# Altium PCB pay-optical.PcbDoc (part 4 of 5)
Units mm, origin at the board's own origin, x right, y up, seen from the top; angles counter-clockwise.
Board outline 128 x 54 mm, 4 copper layers (Top Layer, GND, VCC, Bottom Layer), stack 0.778 mm thick; 461 components, 247 nets, 1368 pads, 498 vias.
Unrouted connection lines stored in the file: 117.
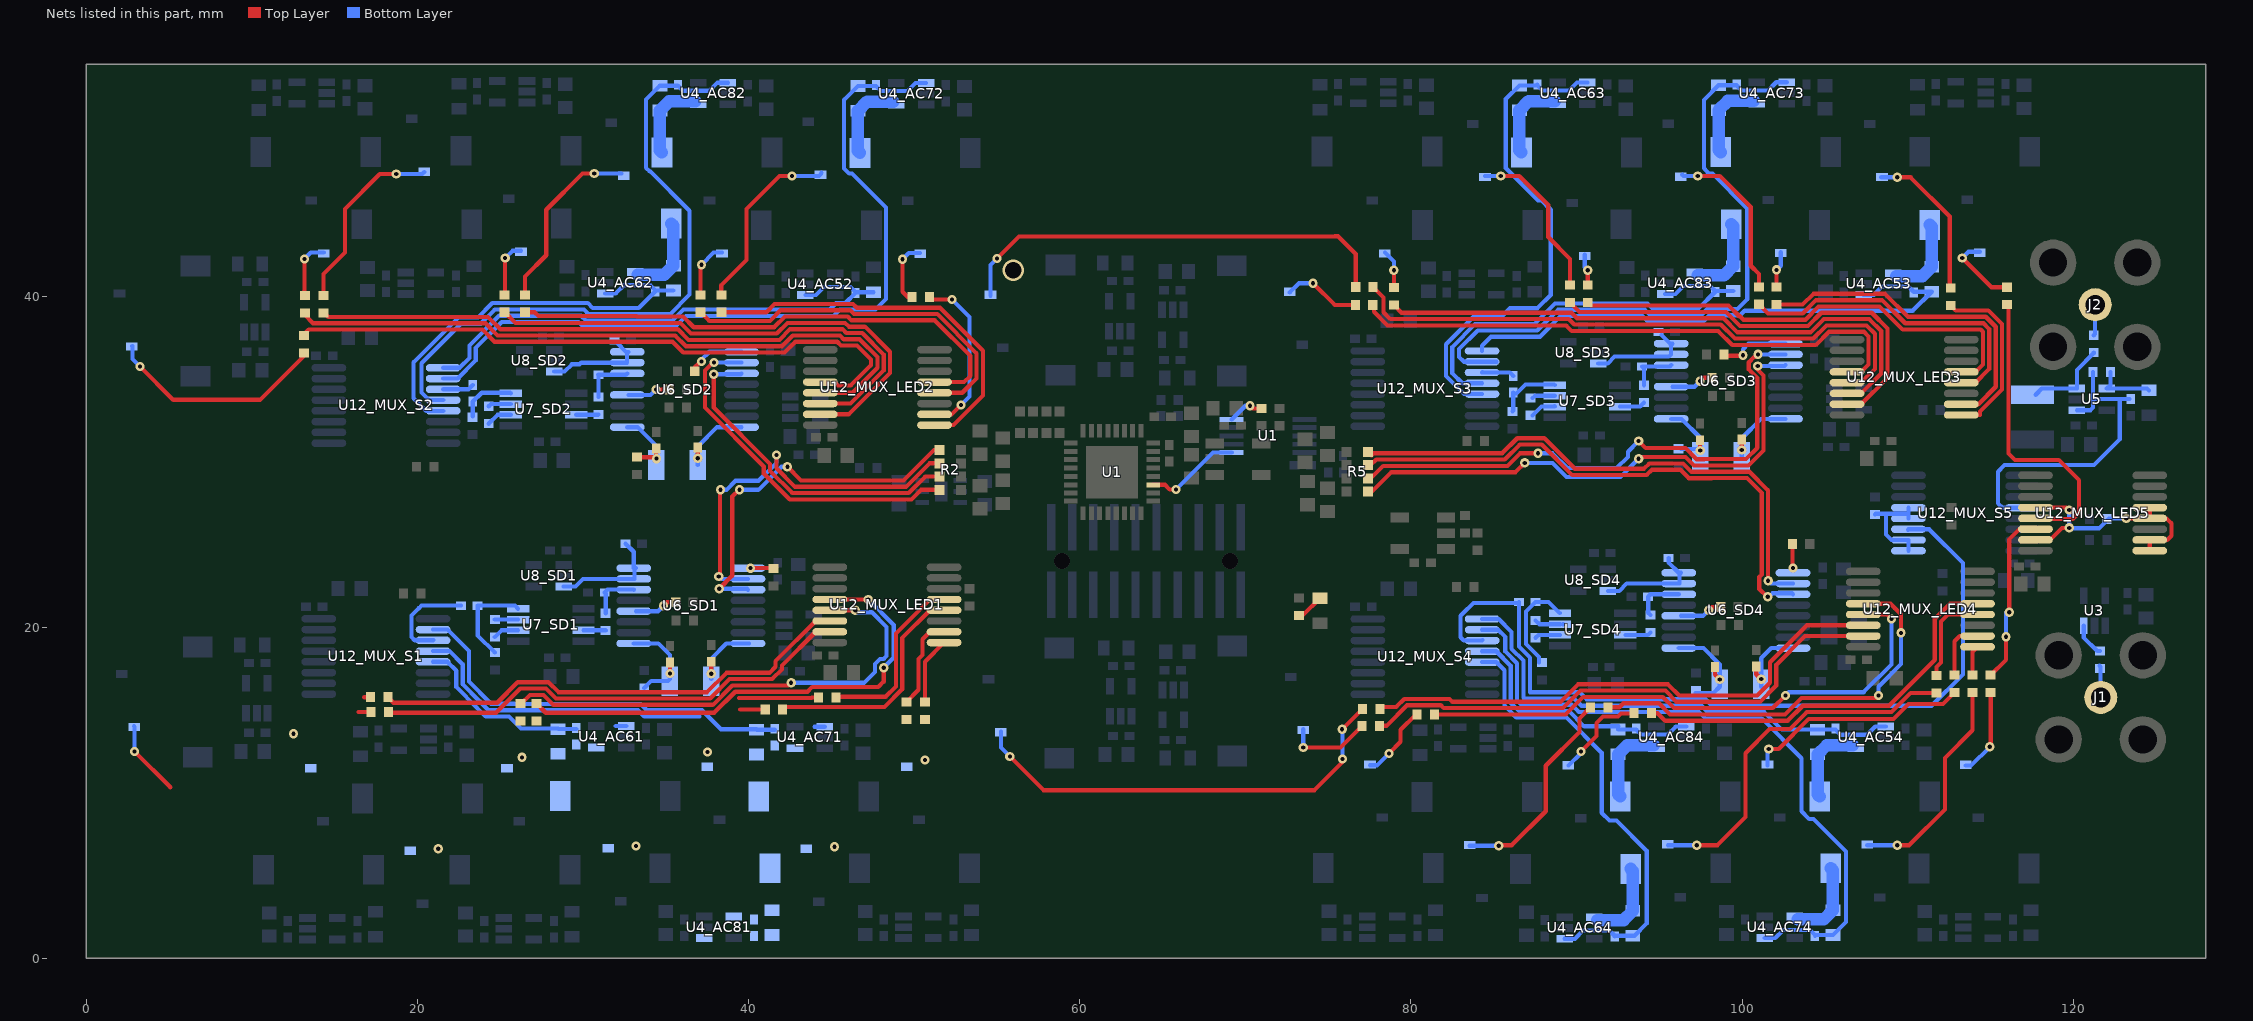
[diagram p6: the nets of this part, all layers, seen from the top]

## Via types
v1: diameter 0.559, hole 0.254, Top Layer to Bottom Layer, 442 vias
v2: diameter 2.362, hole 2.1, Top Layer to Bottom Layer, 34 vias
v3: diameter 1.3, hole 1, Top Layer to Bottom Layer, 14 vias
v4: diameter 6, hole 3.6, Top Layer to Bottom Layer, 8 vias

## Nets (pads, with @x,y where several pads share a name; then routed paths per layer and width w, separated by ;. In a path a pad name is that pad's centre, name@x,y a point inside that pad or via, vN(x,y) a via of type N, cw(c..) or ccw(c..) an arc to the next point about the centre after c; other vN are vias at no path point) (continued)
NetC17_AC52_2: C17_AC52.2 R10_AC52.2 U4_AC52.1 U12_MUX_S2.1 | length 32
  Bottom Layer w0.254: U12_MUX_S2.1@21.555,35.666 22.547,35.666 23.139,36.259 23.139,37.013 24.937,38.811 29.896,38.811 30.192,38.515 35.401,38.515 36.067,39.181 44.899,39.181 45.284,39.566 45.839,39.566 46.461,40.187 C17_AC52.2@46.461,40.234 ; U4_AC52.1@43.434,40.055 44.065,40.055 44.554,40.544 46.151,40.544 C17_AC52.2@46.461,40.234 ; R10_AC52.2@47.547,40.234 C17_AC52.2@46.461,40.234
NetC17_AC53_1: C17_AC53.1 D2_AC53.2 R10_AC53.1 U4_AC53.4 | length 5
  Bottom Layer w0.75: U4_AC53.4@109.311,41.205 C17_AC53.1@110.358,41.205 110.893,41.205 R10_AC53.1@111.448,41.76 111.448,44.173 D2_AC53.2@111.323,44.298
NetC17_AC53_2: C17_AC53.2 R10_AC53.2 U4_AC53.1 U12_MUX_S3.1 | length 33.5
  Bottom Layer w0.254: U12_MUX_S3.1@84.293,36.682 84.293,36.996 84.839,37.541 87.788,37.541 89.032,38.786 93.976,38.786 94.275,38.487 97.685,38.487 98.034,38.837 99.878,38.837 100.158,39.116 110.305,39.116 R10_AC53.2@111.448,40.26 110.362,40.26 110.053,40.569 108.456,40.569 107.967,40.08 U4_AC53.1@107.336,40.08
NetC17_AC54_1: C17_AC54.1 D2_AC54.2 R10_AC54.1 U4_AC54.4 | length 5
  Bottom Layer w0.75: D2_AC54.2@104.679,9.78 104.555,9.904 R10_AC54.1@104.555,12.318 105.109,12.872 C17_AC54.1@105.644,12.872 U4_AC54.4@106.692,12.872
NetC17_AC54_2: C17_AC54.2 R10_AC54.2 U4_AC54.1 U12_MUX_S4.1 | length 29.4
  Bottom Layer w0.254: U12_MUX_S4.1@84.3,20.497 85.299,20.497 86.081,19.715 86.081,18.696 86.792,17.984 86.792,15.739 86.833,15.697 89.856,15.697 90.295,15.258 97.544,15.258 97.943,14.859 101.346,14.859 102.388,13.817 R10_AC54.2@104.555,13.818 105.64,13.818 105.95,13.508 107.547,13.508 108.036,13.997 U4_AC54.1@108.667,13.997
NetC17_AC61_1: C17_AC61.1 D2_AC61.2 R10_AC61.1 U4_AC61.4
NetC17_AC61_2: C17_AC61.2 R10_AC61.2 U4_AC61.1 U12_MUX_S1.5 | length 11.5
  Bottom Layer w0.254: U12_MUX_S1.5@20.946,17.911 21.813,17.911 22.352,17.372 22.352,16.383 23.604,15.131 24.124,14.611 25.527,14.611 26.261,13.876 R10_AC61.2@28.502,13.876 ; R10_AC61.2@28.502,13.851 C17_AC61.2@29.588,13.851 ; 31.983,14.03 U4_AC61.1@32.614,14.03
NetC17_AC62_1: C17_AC62.1 D2_AC62.2 R10_AC62.1 U4_AC62.4 | length 5
  Bottom Layer w0.75: U4_AC62.4@33.319,41.281 C17_AC62.1@34.366,41.281 34.901,41.281 R10_AC62.1@35.456,41.836 35.456,44.249 D2_AC62.2@35.331,44.374
NetC17_AC62_2: C17_AC62.2 R10_AC62.2 U4_AC62.1 U12_MUX_S2.5 | length 25.4
  Bottom Layer w0.254: U12_MUX_S2.5@21.555,33.066 20.534,33.066 19.772,33.827 19.772,35.997 22.485,38.71 23.655,38.71 24.518,39.573 30.294,39.573 30.585,39.282 33.364,39.282 34.37,40.289 C17_AC62.2@34.37,40.336 ; U4_AC62.1@31.344,40.156 31.975,40.156 32.464,40.645 34.061,40.645 C17_AC62.2@34.37,40.336 ; R10_AC62.2@35.456,40.336 C17_AC62.2@34.37,40.336
NetC17_AC63_1: C17_AC63.1 D2_AC63.2 R10_AC63.1 U4_AC63.4 | length 5
  Bottom Layer w0.75: D2_AC63.2@86.672,48.675 86.547,48.8 R10_AC63.1@86.547,51.213 87.102,51.768 C17_AC63.1@87.637,51.768 U4_AC63.4@88.684,51.768
NetC17_AC63_2: C17_AC63.2 R10_AC63.2 U4_AC63.1 U12_MUX_S3.5 | length 30.8
  Bottom Layer w0.254: U12_MUX_S3.5@84.293,34.082 83.21,34.082 82.118,35.174 82.118,37.087 83.781,38.75 85.469,38.75 85.988,39.268 87.644,39.268 88.443,40.068 88.443,45.212 87.884,45.771 87.681,45.771 85.725,47.727 85.725,51.891 R10_AC63.2@86.547,52.713 C17_AC63.2@87.633,52.713 ; C17_AC63.2@87.633,52.76 C17_AC63.2@87.633,52.713 ; U4_AC63.1@90.659,52.893 90.028,52.893 89.539,52.404 87.942,52.404 C17_AC63.2@87.633,52.713
NetC17_AC64_1: C17_AC64.1 D2_AC64.2 R10_AC64.1 U4_AC64.4 | length 5
  Bottom Layer w0.75: U4_AC64.4@91.256,2.312 C17_AC64.1@92.304,2.312 92.839,2.312 R10_AC64.1@93.393,2.867 93.393,5.28 D2_AC64.2@93.269,5.405
NetC17_AC64_2: C17_AC64.2 R10_AC64.2 U4_AC64.1 U12_MUX_S4.5 | length 28.1
  Bottom Layer w0.254: U12_MUX_S4.5@84.3,17.897 85.152,17.897 85.649,17.4 85.649,15.265 86.36,14.554 89.383,14.554 91.516,12.421 91.516,8.797 91.982,8.331 92.405,8.331 94.234,6.502 94.234,2.108 93.493,1.367 R10_AC64.2@93.393,1.367 C17_AC64.2@92.308,1.367 ; U4_AC64.1@89.281,1.188 89.912,1.188 90.401,1.677 91.998,1.677 C17_AC64.2@92.308,1.367 ; C17_AC64.2@92.308,1.32 C17_AC64.2@92.308,1.367
NetC17_AC71_1: C17_AC71.1 D2_AC71.2 R10_AC71.1 U4_AC71.4
NetC17_AC71_2: C17_AC71.2 R10_AC71.2 U4_AC71.1 U12_MUX_S1.2 | length 24.9
  Bottom Layer w0.254: U12_MUX_S1.2@20.946,19.861 21.826,19.861 23.114,18.572 23.114,16.718 24.366,15.466 24.366,15.447 24.44,15.373 25.842,15.373 25.848,15.367 33.475,15.367 33.856,14.986 37.192,14.986 38.34,13.838 R10_AC71.2@40.491,13.838 ; R10_AC71.2@40.491,13.812 C17_AC71.2@41.576,13.812 ; 43.972,13.992 U4_AC71.1@44.603,13.992
NetC17_AC72_1: C17_AC72.1 D2_AC72.2 R10_AC72.1 U4_AC72.4 | length 5
  Bottom Layer w0.75: D2_AC72.2@46.73,48.646 46.605,48.771 R10_AC72.1@46.605,51.184 47.16,51.739 C17_AC72.1@47.695,51.739 U4_AC72.4@48.742,51.739
NetC17_AC72_2: C17_AC72.2 R10_AC72.2 U4_AC72.1 U12_MUX_S2.2 | length 48.2
  Bottom Layer w0.254: U12_MUX_S2.2@21.555,35.016 22.435,35.016 23.52,36.101 23.52,36.855 25.095,38.43 29.738,38.43 30.034,38.134 35.559,38.134 36.225,38.8 45.124,38.8 45.509,39.185 47.657,39.185 48.301,39.829 48.301,45.349 46.253,47.396 46.074,47.396 45.771,47.7 45.771,51.849 R10_AC72.2@46.605,52.684 47.691,52.684 48.001,52.374 49.598,52.374 50.087,52.863 U4_AC72.1@50.718,52.863
NetC17_AC73_1: C17_AC73.1 D2_AC73.2 R10_AC73.1 U4_AC73.4 | length 5
  Bottom Layer w0.75: D2_AC73.2@98.704,48.692 98.58,48.817 R10_AC73.1@98.58,51.23 99.134,51.785 C17_AC73.1@99.669,51.785 U4_AC73.4@100.717,51.785
NetC17_AC73_2: C17_AC73.2 R10_AC73.2 U4_AC73.1 U12_MUX_S3.2 | length 40.7
  Bottom Layer w0.254: U12_MUX_S3.2@85.173,36.032 U12_MUX_S3.2@84.293,36.032 83.198,36.032 82.906,36.324 82.906,36.797 84.031,37.922 87.63,37.922 88.875,39.167 94.134,39.167 94.433,38.868 97.527,38.868 97.877,39.218 99.72,39.218 100.305,39.802 100.305,45.294 98.202,47.396 97.968,47.396 97.917,47.447 97.917,47.49 97.688,47.719 97.688,51.839 R10_AC73.2@98.58,52.73 99.665,52.73 99.975,52.42 101.572,52.42 102.061,52.909 U4_AC73.1@102.692,52.909
NetC17_AC74_1: C17_AC74.1 D2_AC74.2 R10_AC74.1 U4_AC74.4 | length 5
  Bottom Layer w0.75: U4_AC74.4@103.346,2.358 C17_AC74.1@104.393,2.358 104.928,2.358 R10_AC74.1@105.483,2.912 105.483,5.325 D2_AC74.2@105.358,5.45
NetC17_AC74_2: C17_AC74.2 R10_AC74.2 U4_AC74.1 U12_MUX_S4.2 | length 41.1
  Bottom Layer w0.254: U12_MUX_S4.2@84.3,19.847 85.259,19.847 85.7,19.406 85.7,18.538 86.411,17.827 86.411,15.581 86.676,15.316 89.698,15.316 90.138,14.877 97.386,14.877 97.785,14.478 101.189,14.478 103.581,12.085 103.581,8.89 104.047,8.424 104.301,8.424 106.274,6.452 106.274,2.203 R10_AC74.2@105.483,1.412 C17_AC74.2@104.397,1.412 ; U4_AC74.1@101.371,1.233 102.002,1.233 102.491,1.722 104.088,1.722 C17_AC74.2@104.397,1.412 ; C17_AC74.2@104.397,1.365 C17_AC74.2@104.397,1.412
NetC17_AC81_1: C17_AC81.1 D2_AC81.2 R10_AC81.1 U4_AC81.4
NetC17_AC81_2: C17_AC81.2 R10_AC81.2 U4_AC81.1 U12_MUX_S1.4 | length 18.4
  Bottom Layer w0.254: U12_MUX_S1.4@20.946,18.561 21.934,18.561 22.733,17.762 22.733,16.56 23.761,15.532 23.761,15.512 23.985,15.289 24.282,14.992 25.685,14.992 25.69,14.986 33.317,14.986 33.698,14.605 37.034,14.605
NetC17_AC82_1: C17_AC82.1 D2_AC82.2 R10_AC82.1 U4_AC82.4 | length 5
  Bottom Layer w0.75: D2_AC82.2@34.767,48.666 34.642,48.791 R10_AC82.1@34.642,51.204 35.197,51.759 C17_AC82.1@35.732,51.759 U4_AC82.4@36.779,51.759
NetC17_AC82_2: C17_AC82.2 R10_AC82.2 U4_AC82.1 U12_MUX_S2.4 | length 39.9
  Bottom Layer w0.254: U12_MUX_S2.4@21.555,33.716 20.703,33.716 20.251,34.168 20.251,35.937 22.643,38.329 23.813,38.329 24.676,39.192 30.054,39.192 30.35,38.896 35.244,38.896 36.437,40.09 36.439,40.09 36.439,45.151 34.077,47.512 34.036,47.512 33.807,47.741 33.807,51.87 R10_AC82.2@34.642,52.704 35.728,52.704 36.037,52.395 37.634,52.395 38.123,52.884 U4_AC82.1@38.754,52.884
NetC17_AC83_1: C17_AC83.1 D2_AC83.2 R10_AC83.1 U4_AC83.4 | length 5
  Bottom Layer w0.75: U4_AC83.4@97.325,41.248 C17_AC83.1@98.372,41.248 98.907,41.248 R10_AC83.1@99.462,41.803 99.462,44.216 D2_AC83.2@99.337,44.341
NetC17_AC83_2: C17_AC83.2 R10_AC83.2 U4_AC83.1 U12_MUX_S3.4 | length 25.6
  Bottom Layer w0.254: U12_MUX_S3.4@84.293,34.732 83.098,34.732 82.499,35.331 82.499,36.929 83.873,38.303 87.452,38.303 88.697,39.548 94.292,39.548 94.59,39.249 97.37,39.249 98.376,40.256 C17_AC83.2@98.376,40.303 ; U4_AC83.1@95.349,40.123 95.98,40.123 96.469,40.612 98.066,40.612 C17_AC83.2@98.376,40.303 ; R10_AC83.2@99.462,40.303 C17_AC83.2@98.376,40.303
NetC17_AC84_1: C17_AC84.1 D2_AC84.2 R10_AC84.1 U4_AC84.4 | length 5
  Bottom Layer w0.75: D2_AC84.2@92.64,9.785 92.515,9.91 R10_AC84.1@92.515,12.323 93.07,12.878 C17_AC84.1@93.605,12.878 U4_AC84.4@94.652,12.878
NetC17_AC84_2: C17_AC84.2 R10_AC84.2 U4_AC84.1 U12_MUX_S4.4 | length 15.9
  Bottom Layer w0.254: U12_MUX_S4.4@84.3,18.547 85.152,18.547 86.03,17.669 86.03,15.423 86.518,14.935 89.54,14.935 90.462,14.014 R10_AC84.2@92.539,14.014 ; R10_AC84.2@92.515,13.823 93.601,13.823 93.91,13.514 95.508,13.514 95.997,14.003 U4_AC84.1@96.627,14.003
NetC18_1: C18.1 R35.2 U5.1 U12_MUX_S5.12 | length 19.6
  Bottom Layer w0.254: U12_MUX_S5.12@117.021,27.137 U12_MUX_S5.12@116.942,27.216 115.709,27.216 115.443,27.483 115.443,29.388 115.849,29.794 121.247,29.794 122.809,31.356 122.809,33.786 ; U5.1@120.218,33.108 121.031,33.108 121.192,33.269 121.192,33.786 ; R35.2@121.192,35.411 121.192,33.786 ; C18.1@123.393,33.774 123.381,33.786 122.809,33.786 ; 121.192,33.786 122.809,33.786
NetC25_SD1_1: C25_SD1.1 R14_SD1.1 U6_SD1.1 Y1_SD1.2 | length 6.4
  Top Layer w0.254: v1(35.25,17.201) C25_SD1.1@35.25,17.864
  Bottom Layer w0.254: U6_SD1.1@33.064,19.018 34.551,19.018 35.25,18.319 v1(35.25,17.201) 35.25,16.866 35.131,16.747 34.117,16.747 R14_SD1.1@33.698,16.328
NetC25_SD2_1: C25_SD2.1 R14_SD2.1 U6_SD2.1 Y1_SD2.2 | length 4.9
  Top Layer w0.254: R14_SD2.1@33.274,30.268 34.345,30.268 34.417,30.197 C25_SD2.1@34.417,30.793
  Bottom Layer w0.254: U6_SD2.1@32.673,32.08 33.299,32.08 34.433,30.946 v1(34.433,30.181) Y1_SD2.2@34.345,30.268
NetC25_SD3_1: C25_SD3.1 R14_SD3.1 U6_SD3.1 Y1_SD3.2 | length 4.8
  Top Layer w0.254: C25_SD3.1@97.458,31.29 97.458,30.694 v1(97.474,30.678)
  Bottom Layer w0.254: U6_SD3.1@95.714,32.578 96.34,32.578 97.474,31.444 v1(97.474,30.678) 97.386,30.766 R14_SD3.1@96.315,30.766
NetC25_SD4_1: C25_SD4.1 R14_SD4.1 U6_SD4.1 Y1_SD4.2 | length 6.7
  Top Layer w0.254: C25_SD4.1@98.358,17.585 98.358,17.131 v1(98.648,16.84)
  Bottom Layer w0.254: U6_SD4.1@96.172,18.738 97.659,18.738 98.648,17.749 v1(98.648,16.84) 98.648,16.408 98.276,16.036 R14_SD4.1@97.18,16.036
NetC26_SD1_1: C26_SD1.1 U6_SD1.16 Y1_SD1.1 | length 4.6
  Top Layer w0.254: C26_SD1.1@37.744,17.915 37.75,17.91 v1(37.75,17.196)
  Bottom Layer w0.254: Y1_SD1.1@37.75,16.866 v1(37.75,17.196) 37.75,18.116 38.652,19.018 U6_SD1.16@39.964,19.018 ; U6_SD1.16@39.964,19.021 U6_SD1.16@40.029,19.021
NetC26_SD2_1: C26_SD2.1 U6_SD2.16 Y1_SD2.1 | length 4.9
  Top Layer w0.254: C26_SD2.1@36.932,30.844 36.933,30.842 v1(36.933,30.198)
  Bottom Layer w0.254: Y1_SD2.1@36.933,29.791 v1(36.933,30.198) 36.933,30.912 38.102,32.08 U6_SD2.16@39.573,32.08
NetC26_SD3_1: C26_SD3.1 U6_SD3.16 Y1_SD3.1 | length 4.9
  Top Layer w0.254: C26_SD3.1@99.972,31.341 99.974,31.339 v1(99.974,30.695)
  Bottom Layer w0.254: Y1_SD3.1@99.974,30.289 v1(99.974,30.695) 99.974,31.409 101.142,32.578 U6_SD3.16@102.614,32.578
NetC26_SD4_1: C26_SD4.1 U6_SD4.16 Y1_SD4.1 | length 4.8
  Top Layer w0.254: C26_SD4.1@100.858,17.63 C26_SD4.1@100.852,17.636 100.852,17.162 v1(101.148,16.866)
  Bottom Layer w0.254: Y1_SD4.1@101.148,16.408 v1(101.148,16.866) 101.148,18.127 101.76,18.738 U6_SD4.16@103.072,18.738
NetC27_SD1_1: C27_SD1.1 R19_SD1.2 U7_SD1.4 | length 5.8
  Bottom Layer w0.254: R19_SD1.2@24.676,18.471 23.639,19.508 C27_SD1.1@23.639,21.304 25.892,21.304 U7_SD1.4@26.084,21.112
NetC27_SD1_2: C27_SD1.2 U12_MUX_S1.3 | length 6
  Bottom Layer w0.254: U12_MUX_S1.3@20.971,19.236 U12_MUX_S1.3@20.946,19.211 19.837,19.211 19.642,19.406 19.642,20.709 20.074,21.141 20.089,21.141 20.251,21.304 C27_SD1.2@22.639,21.304
NetC27_SD2_1: C27_SD2.1 R19_SD2.2 U7_SD2.4 | length 3.4
  Bottom Layer w0.254: R19_SD2.2@23.341,32.735 C27_SD2.1@23.341,33.62 23.884,34.163 25.601,34.163 U7_SD2.4@25.637,34.127
NetC27_SD2_2: C27_SD2.2 U12_MUX_S2.3 | length 1.9
  Bottom Layer w0.254: U12_MUX_S2.3@21.581,34.392 U12_MUX_S2.3@21.555,34.366 23.087,34.366 C27_SD2.2@23.341,34.62
NetC27_SD3_1: C27_SD3.1 R19_SD3.2 U7_SD3.4 | length 3.7
  Bottom Layer w0.254: R19_SD3.2@86.131,33.037 86.182,33.088 C27_SD3.1@86.182,34.171 ; C27_SD3.1@86.381,34.117 86.925,34.66 88.641,34.66 U7_SD3.4@88.678,34.624
NetC27_SD3_2: C27_SD3.2 U12_MUX_S3.3 | length 2
  Bottom Layer w0.254: U12_MUX_S3.3@84.319,35.408 U12_MUX_S3.3@84.293,35.382 85.971,35.382 C27_SD3.2@86.182,35.171
NetC27_SD4_1: C27_SD4.1 R19_SD4.2 U7_SD4.4 | length 6
  Bottom Layer w0.254: R19_SD4.2@87.732,17.872 87.732,18.207 86.944,18.994 86.944,20.948 C27_SD4.1@87.52,21.524 88.31,21.524 U7_SD4.4@88.981,20.853
NetC27_SD4_2: C27_SD4.2 U12_MUX_S4.3 U12_MUX_S5.3 | length 50.5
  Bottom Layer w0.254: U12_MUX_S4.3@84.325,19.222 U12_MUX_S4.3@84.3,19.197 83.191,19.197 82.996,19.392 82.996,20.695 83.428,21.127 83.442,21.127 83.77,21.455 86.451,21.455 C27_SD4.2@86.52,21.524 86.52,18.839 87.198,18.161 87.198,16.078 90.17,16.078 90.593,15.655 97.795,15.655 98.195,15.254 111.444,15.254 113.335,17.145 113.335,23.876 111.294,25.916 U12_MUX_S5.3@110.042,25.916 U12_MUX_S5.3@110.017,25.891
NetC28_SD1_2: C28_SD1.2 R16_SD1.2 U6_SD1.6 | length 3.1
  Bottom Layer w0.254: R16_SD1.2@31.369,20.845 31.369,22.043 C28_SD1.2@31.314,22.098 31.488,22.272 33.06,22.272 U6_SD1.6@33.064,22.268
NetC28_SD2_2: C28_SD2.2 R16_SD2.2 U6_SD2.6 | length 3.1
  Bottom Layer w0.254: R16_SD2.2@30.933,33.902 30.933,35.236 C28_SD2.2@30.925,35.244 32.587,35.244 U6_SD2.6@32.673,35.33
NetC28_SD3_2: C28_SD3.2 R16_SD3.2 U6_SD3.6 | length 3
  Bottom Layer w0.254: R16_SD3.2@94.082,34.612 94.082,35.626 C28_SD3.2@93.966,35.742 95.628,35.742 U6_SD3.6@95.714,35.828
NetC28_SD4_2: C28_SD4.2 R16_SD4.2 U6_SD4.6 | length 3.1
  Bottom Layer w0.254: R16_SD4.2@94.46,20.737 94.328,20.869 C28_SD4.2@94.328,21.844 94.472,21.988 U6_SD4.6@96.172,21.988
NetC30_SD1_2: C30_SD1.2 U6_SD1.7 U6_SD1.8 U8_SD1.3 | length 6.9
  Bottom Layer w0.254: U8_SD1.3@28.829,22.464 29.545,22.464 29.999,22.918 U6_SD1.7@33.064,22.918 33.115,22.918 U6_SD1.8@33.115,23.553 ; C30_SD1.2@32.576,25.044 33.064,24.556 U6_SD1.8@33.064,23.568 U6_SD1.8@33.202,23.568
NetC30_SD2_2: C30_SD2.2 U6_SD2.7 U6_SD2.8 U8_SD2.3 | length 6.1
  Bottom Layer w0.254: U8_SD2.3@28.266,35.437 28.887,35.437 29.326,35.876 29.794,35.876 29.895,35.977 32.659,35.977 U6_SD2.8@32.659,36.613 ; C30_SD2.2@32.09,37.145 32.608,36.627 U6_SD2.8@32.746,36.627
NetC30_SD3_2: C30_SD3.2 U6_SD3.7 U6_SD3.8 U8_SD3.3 | length 6.1
  Bottom Layer w0.254: U8_SD3.3@91.307,35.934 91.891,35.934 92.297,36.34 95.565,36.34 95.699,36.475 U6_SD3.8@95.699,37.11 ; C30_SD3.2@95.131,37.643 95.649,37.125 U6_SD3.8@95.786,37.125
NetC30_SD4_2: C30_SD4.2 U6_SD4.7 U6_SD4.8 U8_SD4.3 | length 6.4
  Bottom Layer w0.254: U8_SD4.3@91.894,22.195 92.584,22.195 93.027,22.638 U6_SD4.7@96.172,22.638 96.223,22.638 U6_SD4.8@96.223,23.274 ; C30_SD4.2@95.563,24.181 95.563,23.898 U6_SD4.8@96.172,23.288 U6_SD4.8@96.31,23.288
NetD1_AC11_1: D1_AC11.1 R8_AC11.2
  other v1: 21.254,6.627
NetD1_AC12_1: D1_AC12.1 R8_AC12.2 | length 3.3
  Top Layer w0.254: R8_AC12.2@13.157,40.276 13.183,40.301 v1(13.183,42.24)
  Bottom Layer w0.254: v1(13.183,42.24) 13.563,42.621 D1_AC12.1@14.345,42.621
NetD1_AC13_1: D1_AC13.1 R8_AC13.2 | length 27.1
  Top Layer w0.254: v1(55,42.272) 56.324,43.596 75.399,43.596 75.415,43.612 75.59,43.612 76.666,42.537 R8_AC13.2@76.666,40.538
  Bottom Layer w0.254: D1_AC13.1@54.61,40.022 D1_AC13.1@54.61,40.072 54.61,41.882 v1(55,42.272)
  other v3: 55.982,41.554
NetD1_AC14_1: D1_AC14.1 R8_AC14.2 | length 4.5
  Top Layer w0.254: v1(78.675,12.381) 79.375,13.081 79.375,13.809 80.298,14.732 R8_AC14.2@80.374,14.732
  Bottom Layer w0.254: D1_AC14.1@77.527,11.659 77.953,11.659 v1(78.675,12.381)
NetD1_AC15_1: D1_AC15.1 R8_AC15.2 | length 4.7
  Top Layer w0.254: v1(113.29,42.292) 115.052,40.53 R8_AC15.2@116.002,40.53
  Bottom Layer w0.254: v1(113.29,42.292) 113.67,42.672 D1_AC15.1@114.351,42.672
NetD1_AC21_1: D1_AC21.1 R8_AC21.2 | length 0.4
  Top Layer w0.254: 16.789,15.773 R8_AC21.2@17.179,15.773
  other v1: 12.522,13.564
NetD1_AC22_1: D1_AC22.1 R8_AC22.2 | length 11.5
  Top Layer w0.254: R8_AC22.2@14.326,40.022 14.326,41.328 15.621,42.623 15.621,45.263 17.729,47.371 v1(18.72,47.371)
  Bottom Layer w0.254: v1(18.72,47.371) 20.288,47.371 D1_AC22.1@20.416,47.498
NetD1_AC23_1: D1_AC23.1 R8_AC23.2 | length 2.3
  Top Layer w0.254: R8_AC23.2@78.969,40.505 v1(78.969,41.554)
  Bottom Layer w0.254: D1_AC23.1@78.437,42.621 78.969,42.089 v1(78.969,41.554)
NetD1_AC24_1: D1_AC24.1 R8_AC24.2 | length 27.1
  Top Layer w0.254: v1(55.779,12.196) 57.815,10.16 74.168,10.16 75.87,11.862 v1(75.87,12.04) ; v1(75.844,13.835) R8_AC24.2@77.072,15.062
  Bottom Layer w0.254: D1_AC24.1@55.239,13.707 55.239,12.736 v1(55.779,12.196) ; v1(75.844,13.835) 75.87,13.809 v1(75.87,12.04)
NetD1_AC25_1: D1_AC25.1 R8_AC25.2 | length 5.2
  Top Layer w0.254: v1(114.957,12.776) 115.011,12.83 R8_AC25.2@115.011,16.061
  Bottom Layer w0.254: D1_AC25.1@113.5,11.643 113.823,11.643 v1(114.957,12.776)
NetD1_AC31_1: D1_AC31.1 R8_AC31.2 | length 5.4
  Top Layer w0.254: v1(2.921,12.497) 5.08,10.338 ; 16.439,14.884 R8_AC31.2@17.204,14.884
  Bottom Layer w0.254: D1_AC31.1@2.89,14.02 2.921,13.989 v1(2.921,12.497)
NetD1_AC32_1: D1_AC32.1 R8_AC32.2 | length 3.4
  Top Layer w0.254: R8_AC32.2@25.273,40.073 25.298,40.098 v1(25.298,42.291) v1@25.273,42.266
  Bottom Layer w0.254: v1(25.298,42.291) 25.737,42.73 D1_AC32.1@26.258,42.73
NetD1_AC33_1: D1_AC33.1 R8_AC33.2 | length 9.9
  Top Layer w0.254: v1(85.42,47.243) 86.538,47.243 88.29,45.491 88.29,43.561 89.611,42.24 R8_AC33.2@89.611,40.657
  Bottom Layer w0.254: D1_AC33.1@84.474,47.243 v1(85.42,47.243)
NetD1_AC34_1: D1_AC34.1 R8_AC34.2 | length 5.2
  Top Layer w0.254: v1(73.496,12.737) 75.738,12.737 R8_AC34.2@77.047,14.046
  Bottom Layer w0.254: v1(73.496,12.737) D1_AC34.1@73.496,13.842
NetD1_AC41_1: D1_AC41.1 R8_AC41.2
  other v1: 26.314,12.141
NetD1_AC42_1: D1_AC42.1 R8_AC42.2 | length 13.5
  Top Layer w0.254: v1(3.251,35.738) 5.258,33.731 10.5,33.731 13.157,36.389 R8_AC42.2@13.157,36.567
  Bottom Layer w0.254: D1_AC42.1@2.775,36.976 2.794,36.976 2.794,36.195 v1(3.251,35.738)
NetD1_AC43_1: D1_AC43.1 R8_AC43.2 | length 4.7
  Top Layer w0.254: v1(74.085,40.773) 75.404,39.455 R8_AC43.2@76.64,39.455
  Bottom Layer w0.254: D1_AC43.1@72.675,40.209 73.24,40.773 v1(74.085,40.773)
NetD1_AC44_1: D1_AC44.1 R8_AC44.2 | length 12.9
  Top Layer w0.254: v1(85.307,6.797) 85.344,6.834 86.082,6.834 88.138,8.89 88.138,11.633 90.17,13.665 90.17,14.495 R8_AC44.2@90.839,15.164
  Bottom Layer w0.254: D1_AC44.1@83.543,6.797 v1(85.307,6.797)
NetD1_AC51_1: D1_AC51.1 R8_AC51.2
  other v1: 50.648,11.975
NetD1_AC52_1: D1_AC52.1 R8_AC52.2 | length 11.3
  Top Layer w0.254: R8_AC52.2@38.354,40.073 38.354,40.657 39.877,42.18 39.877,45.251 41.875,47.249 v1(42.621,47.249)
  Bottom Layer w0.254: v1(42.621,47.249) 44.247,47.249 44.374,47.376 44.374,47.416 D1_AC52.1@44.399,47.441
NetD1_AC53_1: D1_AC53.1 R8_AC53.2 | length 9.5
  Top Layer w0.254: v1(109.371,47.168) 110.177,47.168 112.535,44.81 112.535,40.543 R8_AC53.2@112.598,40.479
  Bottom Layer w0.254: D1_AC53.1@108.407,47.168 v1(109.371,47.168)
NetD1_AC54_1: D1_AC54.1 R8_AC54.2 | length 13.3
  Top Layer w0.254: v1(109.371,6.834) 110.085,6.834 112.243,8.992 112.243,12.1 113.919,13.776 R8_AC54.2@113.919,16.061
  Bottom Layer w0.254: D1_AC54.1@107.556,6.834 v1(109.371,6.834)
NetD1_AC61_1: D1_AC61.1 R8_AC61.2 | length 4.8
  Top Layer w0.254: 39.421,15.723 43.802,15.723 43.828,15.748 R8_AC61.2@44.23,15.748
  other v1: 33.198,6.782
NetD1_AC62_1: D1_AC62.1 R8_AC62.2 | length 11.1
  Top Layer w0.254: R8_AC62.2@26.492,40.073 26.492,41.18 27.778,42.466 27.778,45.211 29.964,47.396 v1(30.675,47.396)
  Bottom Layer w0.254: v1(30.675,47.396) D1_AC62.1@32.327,47.396
NetD1_AC63_1: D1_AC63.1 R8_AC63.2 | length 1.9
  Top Layer w0.254: R8_AC63.2@90.678,40.657 v1(90.678,41.554)
  Bottom Layer w0.254: D1_AC63.1@90.5,42.494 90.5,41.732 v1(90.678,41.554)
NetD1_AC64_1: D1_AC64.1 R8_AC64.2 | length 5.8
  Top Layer w0.254: v1(90.269,12.497) 91.201,13.429 91.201,14.207 91.599,14.605 92.507,14.605 92.685,14.783 93.455,14.783 R8_AC64.2@93.48,14.808
  Bottom Layer w0.254: D1_AC64.1@89.521,11.643 90.269,12.391 v1(90.269,12.497)
NetD1_AC71_1: D1_AC71.1 R8_AC71.2
  other v1: 45.187,6.743
NetD1_AC72_1: D1_AC72.1 R8_AC72.2 | length 3.9
  Top Layer w0.254: v1(49.295,42.22) 49.295,40.259 49.626,39.929 R8_AC72.2@49.869,39.929
  Bottom Layer w0.254: v1(49.295,42.22) 49.676,42.6 D1_AC72.1@50.356,42.6
NetD1_AC73_1: D1_AC73.1 R8_AC73.2 | length 2.2
  Top Layer w0.254: R8_AC73.2@102.083,40.547 v1(102.083,41.58)
  Bottom Layer w0.254: v1(102.083,41.58) 102.331,41.828 D1_AC73.1@102.331,42.646
NetD1_AC74_1: D1_AC74.1 R8_AC74.2 | length 13.7
  Top Layer w0.254: v1(101.605,12.644) 102.21,12.644 104.018,14.453 109.133,14.453 110.048,15.367 112.133,15.367 R8_AC74.2@112.827,16.061
  Bottom Layer w0.254: D1_AC74.1@101.53,11.657 101.53,12.568 v1(101.605,12.644)
NetD1_AC81_1: D1_AC81.1 R8_AC81.2 | length 1.5
  Top Layer w0.254: 39.497,15.037 R8_AC81.2@41.004,15.037
  other v1: 37.516,12.471
NetD1_AC82_1: D1_AC82.1 R8_AC82.2 | length 3.4
  Top Layer w0.254: R8_AC82.2@37.1,40.073 37.1,41.83 v1(37.154,41.885)
  Bottom Layer w0.254: v1(37.154,41.885) 37.89,42.621 D1_AC82.1@38.393,42.621
NetD1_AC83_1: D1_AC83.1 R8_AC83.2 | length 10
  Top Layer w0.254: v1(97.325,47.243) 98.654,47.243 100.52,45.377 100.52,41.828 101.016,41.332 R8_AC83.2@101.016,40.555
  Bottom Layer w0.254: D1_AC83.1@96.387,47.32 96.463,47.243 v1(97.325,47.243)
NetD1_AC84_1: D1_AC84.1 R8_AC84.2 | length 22.5
  Top Layer w0.254: v1@97.264,6.662 v1(97.264,6.84) 98.508,6.84 100.2,8.531 100.2,12.392 101.663,13.856 102.883,13.856 103.906,14.879 109.021,14.879 110.178,16.036 R8_AC84.2@111.735,16.036
  Bottom Layer w0.254: D1_AC84.1@95.516,6.84 v1(97.264,6.84)
NetD3_1: D3.1 R20.1 | length 1.7
  Top Layer w0.254: R20.1@73.25,20.704 73.454,20.704 D3.1@74.5,21.75
NetJ1_1: J1.1 R36.1 | length 2.3
  Bottom Layer w0.254: J1.1@121.412,16.002 121.648,15.766 121.648,17.611 R36.1@121.59,17.669
NetJ2_1: J2.1 R37.2 | length 1.9
  Bottom Layer w0.254: R37.2@121.234,37.634 121.314,37.714 J2.1@121.314,39.477
NetR2_1: R2.1 U6_SD1.11 | length 22
  Top Layer w0.254: v1(38.227,22.327) 39.014,23.114 39.014,27.889 39.421,28.296 v1(39.446,28.296) ; v1(42.342,29.693) 43.175,28.86 49.358,28.86 51.195,30.697 R2.1@51.522,30.697
  Bottom Layer w0.254: v1(38.227,22.327) 39.906,22.327 U6_SD1.11@39.964,22.268 ; v1(39.446,28.296) 40.589,28.296 41.986,29.693 v1(42.342,29.693)
NetR2_2: R2.2 U6_SD1.10 | length 23.5
  Top Layer w0.254: v1(38.202,23.063) v1@38.278,22.987 ; v1@38.303,22.962 v1@38.278,22.987 ; v1(38.303,28.296) 38.278,28.27 v1@38.278,22.987 ; v1(41.681,30.404) 41.681,29.599 42.801,28.479 49.515,28.479 50.934,29.897 R2.2@51.522,29.897
  Bottom Layer w0.254: v1(38.202,23.063) 38.347,22.918 U6_SD1.10@39.964,22.918 ; v1(38.303,28.296) 38.666,28.296 39.216,28.846 40.6,28.846 41.681,29.927 v1(41.681,30.404)
NetR2_3: R2.3 U6_SD2.11 | length 20.1
  Top Layer w0.254: v1(37.897,35.281) 37.897,33.268 41.3,29.864 41.3,29.441 42.643,28.098 49.673,28.098 50.673,29.097 R2.3@51.522,29.097
  Bottom Layer w0.254: v1(37.897,35.281) 39.524,35.281 U6_SD2.11@39.573,35.33
NetR2_4: R2.4 U6_SD2.10 | length 21.6
  Top Layer w0.254: v1(37.911,35.98) 37.842,35.98 37.363,35.502 37.363,33.263 40.919,29.707 40.919,29.283 42.486,27.717 49.831,27.717 50.412,28.297 R2.4@51.522,28.297
  Bottom Layer w0.254: v1(37.911,35.98) U6_SD2.10@39.573,35.98
NetR4_1: R4.1@70.985,33.215 U1.5@69.176,32.55 | length 2.2
  Top Layer w0.254: v1(70.288,33.37) 70.443,33.215 R4.1@70.985,33.215
  Bottom Layer w0.254: U1.5@69.176,32.55 69.996,33.37 v1(70.288,33.37)
NetR5_1: R5.1 U6_SD3.11 | length 33
  Top Layer w0.254: R5.1@77.409,28.188 77.642,28.188 78.816,29.362 86.312,29.362 v1(86.875,29.925) ; v1(93.75,30.175) 93.849,30.274 96.584,30.274 97.095,29.764 97.853,29.764 97.858,29.769 100.389,29.769 101.295,30.676 101.295,35.204 100.937,35.562 v1(100.937,35.778)
  Bottom Layer w0.254: v1(86.875,29.925) 88.55,29.925 89.4,29.075 92.65,29.075 v1(93.75,30.175) ; v1(100.937,35.778) 102.564,35.778 U6_SD3.11@102.614,35.828
NetR5_2: R5.2 U6_SD3.10 | length 34
  Top Layer w0.254: R5.2@77.409,28.988 77.568,28.988 78.324,29.743 85.823,29.743 86.58,30.5 v1(87.675,30.5) ; v1@93.747,31.25 v1(93.75,31.25) 94.175,30.825 96.573,30.825 97.253,30.145 97.695,30.145 97.7,30.15 100.231,30.15 100.914,30.833 100.914,35.047 100.556,35.404 ; 100.556,35.405 100.404,35.557 100.404,35.999 100.717,36.311 100.883,36.311 100.883,36.478 v1(100.951,36.478) v1@100.992,36.478
  Bottom Layer w0.254: v1(87.675,30.5) 88.557,30.5 89.448,29.608 92.421,29.608 93.1,30.287 93.1,30.6 v1(93.75,31.25) ; v1(100.951,36.478) U6_SD3.10@102.614,36.478
NetR5_3: R5.3 U6_SD4.11 | length 34
  Top Layer w0.254: R5.3@77.409,29.788 77.568,29.788 77.905,30.124 85.666,30.124 86.575,31.033 87.896,31.033 89.735,29.194 94.236,29.194 94.554,29.512 96.269,29.512 96.78,29.002 98.168,29.002 98.174,29.007 100.291,29.007 101.189,28.109 101.189,23.183 101.037,23.03 101.037,22.302 101.495,21.844 v1(101.549,21.844) v1@101.549,21.863
  Bottom Layer w0.254: v1@101.538,21.844 v1(101.549,21.844) 101.625,21.844 101.829,22.047 103.013,22.047 U6_SD4.11@103.072,21.988
NetR5_4: R5.4 U6_SD4.10 | length 33.4
  Top Layer w0.254: R5.4@77.409,30.588 77.619,30.378 77.747,30.505 85.508,30.505 86.417,31.414 88.054,31.414 89.893,29.575 94.078,29.575 94.396,29.893 96.427,29.893 96.937,29.383 98.01,29.383 98.016,29.388 100.449,29.388 101.57,28.266 v1(101.57,22.809) v1@101.538,22.809
  Bottom Layer w0.254: v1@101.57,22.754 v1(101.57,22.809) 101.741,22.638 U6_SD4.10@103.072,22.638
NetR8_AC11_1: R8_AC11.1 U12_MUX_LED1.13 | length 29.7
  Top Layer w0.254: R8_AC11.1@26.238,15.384 26.269,15.384 26.798,15.913 27.609,15.913 28.209,15.312 37.842,15.312 39.014,16.485 42.405,16.485 v1(42.57,16.65) ; U12_MUX_LED1.13@44.907,21.025 v1(46.437,21.025)
  Bottom Layer w0.254: v1(42.57,16.65) 46.952,16.65 46.965,16.637 47.63,17.302 47.63,17.777 47.942,18.09 48.158,18.09 48.336,18.268 48.336,20.008 47.435,20.909 46.554,20.909 v1(46.437,21.025)
NetR8_AC12_1: R8_AC12.1 U12_MUX_LED2.13 | length 41
  Top Layer w0.254: R8_AC12.1@13.208,38.972 13.208,38.845 13.699,38.354 24.108,38.354 24.845,37.617 35.566,37.617 36.213,36.97 42.019,36.97 42.666,37.617 45.513,37.617 45.741,37.389 46.705,37.389 47.777,36.316 47.777,35.669 46.266,34.157 U12_MUX_LED2.13@44.332,34.157
NetR8_AC13_1: R8_AC13.1 U12_MUX_LED3.13 | length 36.8
  Top Layer w0.254: R8_AC13.1@77.716,40.538 78.334,39.92 78.334,39.02 78.745,38.608 89.533,38.608 89.863,38.278 98.71,38.278 99.561,37.427 104.292,37.427 105.092,38.227 107.514,38.227 108.018,37.723 108.018,35.599 107.186,34.767 U12_MUX_LED3.13@106.333,34.767
NetR8_AC14_1: R8_AC14.1 U12_MUX_LED4.13 | length 34
  Top Layer w0.254: R8_AC14.1@81.424,14.732 89.343,14.732 90.4,15.79 95.208,15.79 95.885,15.113 101.852,15.113 v1(102.614,15.875) ; U12_MUX_LED4.13@107.315,20.768 108.747,20.768 v1(109.017,20.498)
  Bottom Layer w0.254: v1(102.614,15.875) 102.817,16.078 107.34,16.078 109.017,17.755 v1(109.017,20.498)
NetR8_AC15_1: R8_AC15.1 U12_MUX_LED5.13 | length 18.7
  Top Layer w0.254: R8_AC15.1@116.002,39.48 116.078,39.404 116.078,30.497 116.475,30.1 119.125,30.1 120.345,28.88 120.345,26.911 119.967,26.533 117.75,26.533 U12_MUX_LED5.13@117.712,26.571
NetR8_AC21_1: R8_AC21.1 U12_MUX_LED1.14 | length 29.6
  Top Layer w0.254: R8_AC21.1@18.229,15.773 18.564,15.438 24.82,15.438 26.056,16.675 27.924,16.675 28.521,16.078 37.49,16.078 38.659,17.247 41.267,17.247 41.631,17.61 41.631,17.951 44.055,20.375 U12_MUX_LED1.14@44.907,20.375
NetR8_AC22_1: R8_AC22.1 U12_MUX_LED2.14 | length 41
  Top Layer w0.254: R8_AC22.1@14.326,38.972 14.351,38.997 14.613,38.735 24.266,38.735 25.002,37.998 35.723,37.998 36.371,37.351 41.861,37.351 42.509,37.998 45.671,37.998 45.899,37.77 46.863,37.77 48.158,36.474 48.158,35.511 46.155,33.507 U12_MUX_LED2.14@44.332,33.507
NetR8_AC23_1: R8_AC23.1 U12_MUX_LED3.14 | length 35.9
  Top Layer w0.254: R8_AC23.1@78.969,39.455 79.434,38.989 89.69,38.989 90.021,38.659 98.868,38.659 99.718,37.808 104.135,37.808 104.935,38.608 107.672,38.608 108.399,37.881 108.399,35.33 107.186,34.117 U12_MUX_LED3.14@106.333,34.117
NetR8_AC24_1: R8_AC24.1 U12_MUX_LED4.14 | length 32.7
  Top Layer w0.254: R8_AC24.1@78.122,15.062 78.237,15.177 79.108,15.177 79.598,15.667 82.326,15.667 82.499,15.494 89.027,15.494 90.085,16.552 95.524,16.552 96.201,15.875 100.912,15.875 101.682,16.645 101.682,17.887 103.913,20.118 U12_MUX_LED4.14@107.315,20.118
NetR8_AC25_1: R8_AC25.1 U12_MUX_LED5.14 | length 10.6
  Top Layer w0.254: R8_AC25.1@115.011,17.111 115.931,18.031 v1(115.931,19.426) ; v1(116.125,20.9) 116.125,25.3 116.746,25.921 U12_MUX_LED5.14@117.712,25.921
  Bottom Layer w0.254: v1(115.931,19.426) 115.931,20.869 115.961,20.9 v1(116.125,20.9)
NetR8_AC31_1: R8_AC31.1 U12_MUX_LED1.15 | length 29.3
  Top Layer w0.254: R8_AC31.1@18.254,14.884 18.305,14.834 24.754,14.834 26.214,16.294 27.766,16.294 28.367,15.693 37.684,15.693 38.857,16.866 41.425,16.866 42.012,17.452 42.012,17.682 44.055,19.725 U12_MUX_LED1.15@44.907,19.725
NetR8_AC32_1: R8_AC32.1 U12_MUX_LED2.15 | length 31.3
  Top Layer w0.254: R8_AC32.1@25.273,39.023 25.916,38.379 35.881,38.379 36.529,37.732 41.703,37.732 42.351,38.379 45.828,38.379 46.057,38.151 47.021,38.151 48.539,36.632 48.539,35.353 46.044,32.857 U12_MUX_LED2.15@44.332,32.857
NetR8_AC33_1: R8_AC33.1 U12_MUX_LED3.15 | length 26.6
  Top Layer w0.254: R8_AC33.1@89.611,39.607 90.178,39.04 99.025,39.04 99.876,38.189 103.977,38.189 104.777,38.989 107.83,38.989 108.78,38.039 108.78,35.061 107.186,33.467 U12_MUX_LED3.15@106.333,33.467
NetR8_AC34_1: R8_AC34.1 U12_MUX_LED4.15 | length 32.9
  Top Layer w0.254: R8_AC34.1@78.097,14.046 78.516,14.046 79.756,15.286 81.804,15.286 81.977,15.113 89.185,15.113 90.243,16.171 95.366,16.171 96.043,15.494 101.07,15.494 102.063,16.487 102.063,17.729 103.801,19.468 U12_MUX_LED4.15@107.315,19.468
NetR8_AC41_1: R8_AC41.1 U12_MUX_LED1.12 | length 30.1
  Top Layer w0.254: R8_AC41.1@27.203,15.384 27.754,14.834 37.922,14.834 39.192,16.104 43.561,16.104 43.84,16.383 47.828,16.383 48.158,16.713 48.158,17.551 v1(48.163,17.556) ; U12_MUX_LED1.12@44.907,21.675 v1(47.233,21.675)
  Bottom Layer w0.254: v1(47.233,21.675) 48.768,20.14 48.768,18.161 v1(48.163,17.556)
NetR8_AC42_1: R8_AC42.1 U12_MUX_LED2.12 | length 39.7
  Top Layer w0.254: R8_AC42.1@13.157,37.617 13.157,37.691 13.439,37.973 23.927,37.973 24.664,37.236 35.408,37.236 36.055,36.589 42.177,36.589 42.824,37.236 45.355,37.236 45.584,37.008 46.547,37.008 47.396,36.159 47.396,35.826 46.165,34.595 45.397,34.595 45.184,34.807 U12_MUX_LED2.12@44.332,34.807
NetR8_AC43_1: R8_AC43.1 U12_MUX_LED3.12 | length 34.8
  Top Layer w0.254: R8_AC43.1@77.69,39.455 77.766,39.378 77.766,39.048 78.588,38.227 89.375,38.227 89.705,37.897 98.552,37.897 99.403,37.046 104.45,37.046 105.25,37.846 107.357,37.846 107.637,37.565 107.637,35.868 107.186,35.417 U12_MUX_LED3.12@106.333,35.417
NetR8_AC44_1: R8_AC44.1 U12_MUX_LED4.12 | length 25.2
  Top Layer w0.254: R8_AC44.1@91.889,15.164 92.583,15.164 92.828,15.409 94.971,15.409 95.647,14.732 102.592,14.732 103.582,15.723 108.077,15.723 v1(108.229,15.875) ; U12_MUX_LED4.12@107.315,21.418 108.952,21.418 109.221,21.149 109.235,21.149 109.578,20.805 109.576,20.803 109.601,20.777 v1(109.601,19.66)
  Bottom Layer w0.254: v1(108.229,15.875) 108.229,16.408 109.601,17.78 v1(109.601,19.66)
NetR8_AC51_1: R8_AC51.1 U12_MUX_LED1.1 | length 4.1
  Top Layer w0.254: R8_AC51.1@50.648,15.486 50.648,17.916 U12_MUX_LED1.1@51.807,19.075
NetR8_AC52_1: R8_AC52.1 U12_MUX_LED2.1 | length 23.5
  Top Layer w0.254: R8_AC52.1@38.354,39.023 41.072,39.023 41.571,39.522 46.302,39.522 46.53,39.294 51.556,39.294 54.153,36.697 54.153,33.993 52.367,32.207 U12_MUX_LED2.1@51.232,32.207
NetR8_AC53_1: R8_AC53.1 U12_MUX_LED3.1 | length 10.7
  Top Layer w0.254: R8_AC53.1@112.598,39.429 112.895,39.133 114.867,39.133 115.697,38.302 115.697,34.361 114.369,33.032 114.369,32.817 U12_MUX_LED3.1@113.233,32.817
NetR8_AC54_1: R8_AC54.1 U12_MUX_LED4.1 | length 1.8
  Top Layer w0.254: R8_AC54.1@113.919,17.111 113.919,18.522 U12_MUX_LED4.1@114.215,18.818
NetR8_AC61_1: R8_AC61.1 U12_MUX_LED1.5 | length 10.9
  Top Layer w0.254: R8_AC61.1@45.28,15.748 45.331,15.799 48.28,15.799 48.895,16.414 48.895,19.616 50.955,21.675 U12_MUX_LED1.5@51.807,21.675
NetR8_AC62_1: R8_AC62.1 U12_MUX_LED2.5 | length 32
  Top Layer w0.254: R8_AC62.1@26.492,39.023 27.076,39.023 27.313,38.786 33.232,38.786 33.257,38.76 36.039,38.76 36.686,38.113 41.546,38.113 42.193,38.76 45.986,38.76 46.215,38.532 51.24,38.532 53.391,36.381 53.391,35.182 53.016,34.807 U12_MUX_LED2.5@51.232,34.807
NetR8_AC63_1: R8_AC63.1 U12_MUX_LED3.5 | length 28.7
  Top Layer w0.254: R8_AC63.1@90.678,39.607 90.864,39.421 99.183,39.421 99.823,38.782 99.877,38.782 100.089,38.57 103.819,38.57 104.619,39.37 108.296,39.37 109.693,37.973 114.41,37.973 114.537,37.846 114.537,35.868 114.086,35.417 U12_MUX_LED3.5@113.233,35.417
NetR8_AC64_1: R8_AC64.1 U12_MUX_LED4.5 | length 24.2
  Top Layer w0.254: R8_AC64.1@94.53,14.808 94.894,14.808 95.352,14.351 102.749,14.351 103.658,15.26 108.863,15.26 111.633,18.03 111.633,20.498 112.553,21.418 U12_MUX_LED4.5@114.215,21.418
NetR8_AC71_1: R8_AC71.1 U12_MUX_LED1.2 | length 5.7
  Top Layer w0.254: R8_AC71.1@49.53,15.486 50.267,16.222 50.267,18.085 50.503,18.321 50.503,19.274 50.955,19.725 U12_MUX_LED1.2@51.807,19.725
NetR8_AC72_1: R8_AC72.1 U12_MUX_LED2.2 | length 10.3
  Top Layer w0.254: R8_AC72.1@50.919,39.929 51.05,39.797 v1(52.278,39.797) ; U12_MUX_LED2.2@51.232,32.857 52.263,32.857 v1(52.832,33.426)
  Bottom Layer w0.254: v1(52.278,39.797) 53.34,38.735 53.34,33.934 v1(52.832,33.426)
NetR8_AC73_1: R8_AC73.1 U12_MUX_LED3.2 | length 20.5
  Top Layer w0.254: R8_AC73.1@102.083,39.497 102.1,39.48 103.651,39.48 104.303,40.132 108.636,40.132 110.016,38.752 114.709,38.752 115.316,38.145 115.316,34.519 114.264,33.467 U12_MUX_LED3.2@113.233,33.467
NetR8_AC74_1: R8_AC74.1 U12_MUX_LED4.2 | length 3.6
  Top Layer w0.254: R8_AC74.1@112.827,17.111 112.827,19.152 113.143,19.468 U12_MUX_LED4.2@114.215,19.468
NetR8_AC81_1: R8_AC81.1 U12_MUX_LED1.4 | length 14
  Top Layer w0.254: R8_AC81.1@42.054,15.037 42.206,15.189 48.209,15.189 49.276,16.256 49.276,19.347 50.955,21.025 U12_MUX_LED1.4@51.807,21.025
NetR8_AC82_1: R8_AC82.1 U12_MUX_LED2.4 | length 22.7
  Top Layer w0.254: R8_AC82.1@37.1,39.023 37.629,38.494 41.288,38.494 41.935,39.141 46.144,39.141 46.373,38.913 51.398,38.913 53.772,36.539 53.772,35.024 52.905,34.157 U12_MUX_LED2.4@51.232,34.157
NetR8_AC83_1: R8_AC83.1 U12_MUX_LED3.4 | length 19.6
  Top Layer w0.254: R8_AC83.1@101.016,39.505 101.57,38.951 103.661,38.951 104.461,39.751 108.454,39.751 109.851,38.354 114.568,38.354 114.918,38.004 114.918,35.599 114.086,34.767 U12_MUX_LED3.4@113.233,34.767
NetR8_AC84_1: R8_AC84.1 U12_MUX_LED4.4 | length 5.7
  Top Layer w0.254: R8_AC84.1@111.735,17.086 111.735,17.593 112.014,17.872 112.014,20.34 112.442,20.768 U12_MUX_LED4.4@114.215,20.768
NetR9_SD1_1: R9_SD1.1 U7_SD1.3 | length 1.4
  Bottom Layer w0.254: R9_SD1.1@24.676,20.464 26.082,20.464 U7_SD1.3@26.084,20.462
NetR9_SD1_2: R9_SD1.2 U7_SD1.2 | length 1.6
  Bottom Layer w0.254: R9_SD1.2@24.676,19.414 25.074,19.812 U7_SD1.2@26.084,19.812
NetR9_SD2_1: R9_SD2.1 U7_SD2.3 | length 1.4
  Bottom Layer w0.254: R9_SD2.1@24.308,33.342 24.443,33.477 U7_SD2.3@25.637,33.477
NetR9_SD2_2: R9_SD2.2 U7_SD2.2 | length 1.6
  Bottom Layer w0.254: R9_SD2.2@24.308,32.292 24.843,32.827 U7_SD2.2@25.637,32.827 U7_SD2.2@25.622,32.842
NetR9_SD3_1: R9_SD3.1 U7_SD3.3 | length 1.4
  Bottom Layer w0.254: R9_SD3.1@87.348,33.839 87.483,33.974 U7_SD3.3@88.678,33.974
NetR9_SD3_2: R9_SD3.2 U7_SD3.2 | length 1.6
  Bottom Layer w0.254: R9_SD3.2@87.348,32.789 87.883,33.324 U7_SD3.2@88.678,33.324 U7_SD3.2@88.662,33.34
NetR9_SD4_1: R9_SD4.1 U7_SD4.3 | length 1.6
  Bottom Layer w0.254: R9_SD4.1@87.528,20.413 87.759,20.183 U7_SD4.3@89.002,20.183 ; U7_SD4.3@89.19,20.185 U7_SD4.3@89.192,20.183
NetR9_SD4_2: R9_SD4.2 U7_SD4.2 | length 1.5
  Bottom Layer w0.254: R9_SD4.2@87.528,19.363 87.698,19.533 U7_SD4.2@89.002,19.533
NetR11_2: R11.2 U12_MUX_S5.1 U12_MUX_S5.2 U12_MUX_S5.4 U12_MUX_S5.5 | length 6.1
  Bottom Layer w0.254: R11.2@108.026,26.805 108.069,26.848 108.687,26.848 ; U12_MUX_S5.1@110.042,24.616 U12_MUX_S5.2@110.042,25.266 109.023,25.266 108.687,25.603 108.687,26.848 ; U12_MUX_S5.4@110.042,26.566 110.042,26.848 ; U12_MUX_S5.5@110.042,27.216 110.042,26.848 ; 108.687,26.848 110.042,26.848
NetR12_2: R12.2 U12_MUX_LED5.1 U12_MUX_LED5.2 U12_MUX_LED5.4 U12_MUX_LED5.5 U12_MUX_LED5.12 U12_MUX_LED5.15 | length 15.3
  Top Layer w0.254: U12_MUX_LED5.15@117.712,25.271 118.596,25.271 119.325,26 v1(119.75,26) ; U12_MUX_LED5.12@117.712,27.221 117.796,27.137 U12_MUX_LED5.12@117.812,27.153 ; U12_MUX_LED5.12@118.089,27.225 119.607,27.225 v1(119.756,27.076) ; v1(123.196,26.571) U12_MUX_LED5.4@124.612,26.571 ; U12_MUX_LED5.1@124.612,24.621 U12_MUX_LED5.2@124.612,25.271 125.671,25.271 125.925,25.525 125.925,26.275 125.629,26.571 U12_MUX_LED5.4@124.612,26.571 ; U12_MUX_LED5.5@124.612,27.221 U12_MUX_LED5.4@124.612,26.571
  Bottom Layer w0.254: v1(119.756,27.076) 119.756,26.006 v1(119.75,26) 119.779,25.971 121.546,25.971 122.146,26.571 v1(123.196,26.571)
NetR13_2: R13.2 R35.1 U5.4 | length 3.7
  Bottom Layer w0.254: R35.1@122.242,35.411 122.242,34.631 U5.4@122.018,34.408 124.457,34.408 R13.2@124.562,34.303
NetR16_SD1_1: R16_SD1.1 U7_SD1.7 | length 1.3
  Bottom Layer w0.254: U7_SD1.7@30.034,19.812 31.352,19.812 R16_SD1.1@31.369,19.795
NetR16_SD2_1: R16_SD2.1 U7_SD2.7 | length 1.4
  Bottom Layer w0.254: U7_SD2.7@29.587,32.827 30.908,32.827 R16_SD2.1@30.933,32.852
NetR16_SD3_1: R16_SD3.1 U7_SD3.7 | length 1.6
  Bottom Layer w0.254: U7_SD3.7@92.628,33.324 93.844,33.324 R16_SD3.1@94.082,33.562
NetR16_SD4_1: R16_SD4.1 U7_SD4.7 | length 1.6
  Bottom Layer w0.254: U7_SD4.7@92.952,19.533 94.306,19.533 R16_SD4.1@94.46,19.687
NetR17_SD1_1: R17_SD1.1 U6_SD1.9 | length 1.6
  Top Layer w0.254: v1(40.111,23.568) 41.473,23.568 R17_SD1.1@41.504,23.537
  Bottom Layer w0.254: U6_SD1.9@39.964,23.568 v1(40.111,23.568)
NetR17_SD2_1: R17_SD2.1 U6_SD2.9 | length 3.3
  Top Layer w0.254: R17_SD2.1@36.771,35.65 36.771,35.724 37.125,36.079 v1(37.152,36.052)
  Bottom Layer w0.254: v1(37.152,36.052) 37.152,36.159 37.624,36.63 U6_SD2.9@39.573,36.63
NetR17_SD3_1: R17_SD3.1 U6_SD3.9 | length 4.1
  Top Layer w0.254: R17_SD3.1@99.1,36.426 99.131,36.395 100.055,36.395 v1(100.055,36.427)
  Bottom Layer w0.254: v1(100.055,36.427) 100.055,36.79 100.393,37.128 U6_SD3.9@102.614,37.128
NetR17_SD4_1: R17_SD4.1 U6_SD4.9 | length 1.5
  Top Layer w0.254: R17_SD4.1@103.034,25.025 103.034,23.616 v1(103.075,23.575)
NetR18_SD1_1: R18_SD1.1 U6_SD1.4 | length 2.6
  Top Layer w0.254: v1(34.869,21.304) 35.073,21.507 R18_SD1.1@35.6,21.507
  Bottom Layer w0.254: U6_SD1.4@33.202,20.968 34.533,20.968 v1(34.869,21.304)
NetR18_SD2_1: R18_SD2.1 U6_SD2.4 | length 2.6
  Top Layer w0.254: v1(34.413,34.363) R18_SD2.1@35.2,34.363
  Bottom Layer w0.254: U6_SD2.4@32.746,34.027 34.077,34.027 v1(34.413,34.363)
NetR18_SD3_1: R18_SD3.1 U6_SD3.4 | length 2.6
  Top Layer w0.254: v1(97.454,34.861) 97.657,35.064 R18_SD3.1@98.185,35.064
  Bottom Layer w0.254: U6_SD3.4@95.786,34.525 97.118,34.525 v1(97.454,34.861)
NetR18_SD4_1: R18_SD4.1 U6_SD4.4 | length 2.6
  Top Layer w0.254: v1(97.977,21.024) 98.18,21.228 R18_SD4.1@98.708,21.228
  Bottom Layer w0.254: U6_SD4.4@96.31,20.688 97.641,20.688 v1(97.977,21.024)
NetR36_2: R36.2 U3.3 | length 2
  Bottom Layer w0.254: U3.3@120.625,20.089 120.625,19.38 121.446,18.559 R36.2@121.615,18.559
NetR37_1: R37.1 R38.2 U5.3 | length 5.2
  Bottom Layer w0.254: R38.2@117.729,34.04 118.097,34.408 U5.3@120.218,34.408 120.218,35.535 121.234,36.551 R37.1@121.234,36.584
NetU1_1: U1.1@69.176,30.55 U1.19 | length 5.9
  Top Layer w0.254: U1.19@64.44,28.6 65.151,28.6 65.43,28.321 v1(65.811,28.321) v1@65.909,28.321
  Bottom Layer w0.254: v1(65.811,28.321) 68.04,30.55 U1.1@69.176,30.55